# Altium PCB PIPOCPUF_2006.PCBDOC (part 2 of 6)
Units mil, origin at the board's own origin, x right, y up, seen from the top; angles counter-clockwise.
Board outline 8500 x 4525 mil, 2 copper layers (Top Layer, Top, Bottom Layer, Bottom); 345 components, 259 nets, 1116 pads, 603 vias.
Unrouted connection lines stored in the file: 781.
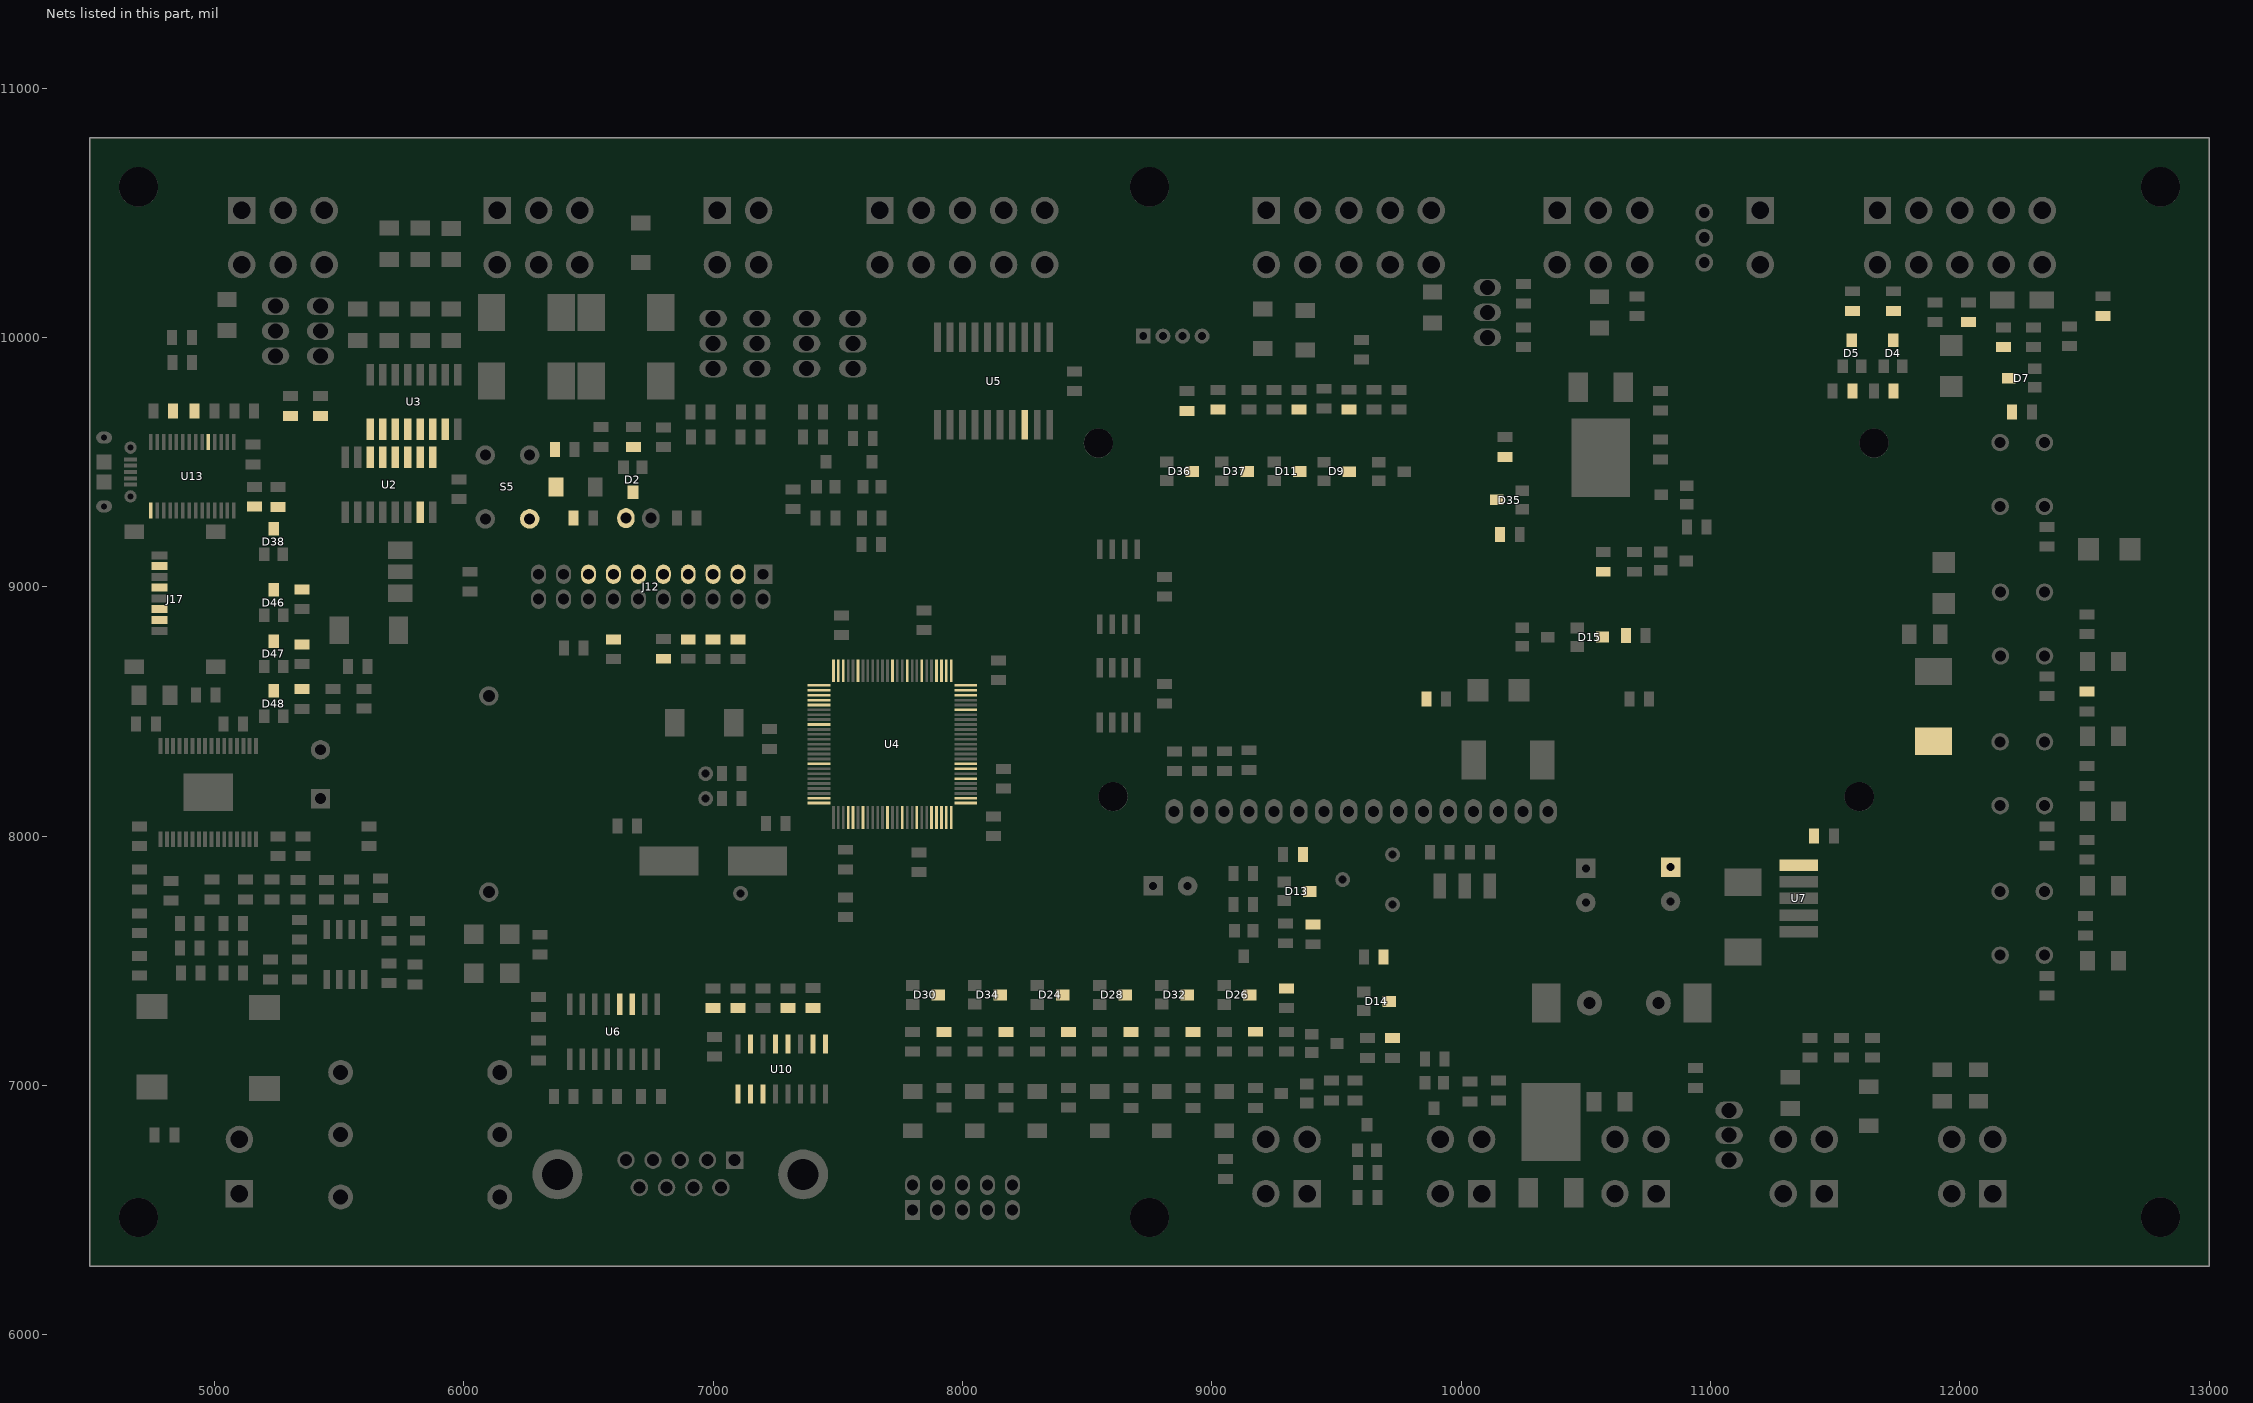
[diagram p2: the nets of this part, all layers, seen from the top]

## Via types
v1: diameter 28, hole 16, Top Layer, Top to Bottom Layer, Bottom, 595 vias
v2: diameter 36, hole 24, Top Layer, Top to Bottom Layer, Bottom, 4 vias
v3: diameter 40, hole 24, Top Layer, Top to Bottom Layer, Bottom, 4 vias

## Nets (pads, with @x,y where several pads share a name; then routed paths per layer and width w, separated by ;. In a path a pad name is that pad's centre, name@x,y a point inside that pad or via, vN(x,y) a via of type N, cw(c..) or ccw(c..) an arc to the next point about the centre after c; other vN are vias at no path point) (continued)
NETR128_1: R128.1 R129.2 U13.19
NETU2_1: U2.1 U3.6
NETU2_2: U2.2 U3.5
NETU2_3: U2.3 U3.4
NETU2_4: U2.4 U3.3
NETU2_5: U2.5 U3.2
NETU2_6: U2.6 U3.1
NETU2_15: U2.15 U3.7
P_FITA_LED_DIR: R38.1 U4.85
P_FITA_LED_ESQ: R36.1 U4.82
PULSO_CONT_MOTOR: R13.1 U4.70
PULSO_CONT_RES: R12.2 U4.73
PULSO_MOEDE_UCA1: C32.2 D13.3 R42.1 U4.51
PULSO_NOTEI_P70: C33.2 D14.3 R43.2 U4.50
REED_DOSADOR: D2.3 R8.2 U4.88
RESET: C34.2 D3.1 J12.15 R48.1 S5.2 U4.17
RM5_CH1: D24.3 R74.2 U4.59
RM5_CH2: D28.3 R79.2 U4.58
RM5_CH3: D32.3 R91.2 U4.25
RM5_CH4: D26.3 R75.2 U4.24
RM5_CH5: D30.3 R84.2 U4.29
RM5_CH6: D34.3 R92.2 U4.30
RM5_INHIBIT: R70.2 U4.40
RS232_RXD: U6.12 U10.1
RS232_TXD: R62.2 U6.11 U10.12
RTCK: J12.11 J14.2 U4.100
RXD_MDB: C49.2 D35.3 R101.2 U4.49
RXD_MOEDEIRO: D15.3 R59.2 U4.99
RXD_PROG: R64.1 U4.47 U10.3
SAIDA_01: U4.95 U5.8
SAIDA_PAPEL: D11.3 R23.2 U4.37
SD_CS: D48.3 J17.2 R4.2 U4.79
SD_MISO: D38.3 J17.7 U4.77
SD_MOSI: D47.3 J17.3 R5.2 U4.76
SD_SCLK: D46.3 J17.5 R6.2 U4.78
SEL_PROG_DEX_A: U4.43 U10.10
SEL_PROG_DEX_B: U4.56 U10.9
SINAL_RPM: C10.1 D5.3 R15.2 U4.32
SINCRONISMO_60HZ: C9.1 D4.3 R11.2 U4.52
SW_MINIMO_PAPEL: D9.3 R21.2
TCK: J12.9 R51.1 U4.5
TDI: J12.5 R46.2 U4.2
TDO: J12.13 R44.2 U4.1
TELET_RXD: D37.3 R102.2 U4.74
TELET_TXD: D36.3 R97.2 U4.75
TEMPERATURA: C11.2 D7.3 R17.2 U4.9
TMS: J12.7 R45.2 U4.3
TRSTN: J12.3 R47.2 U4.4
TXD_MDB: R98.2 U4.48
TXD_MOEDEIRO: R60.2 U4.98
TXD_PROG: R63.1 U4.46 U10.13
USB_RXD: R126.1 R127.2 U10.2
USB_TXD: R122.2 U10.15 U13.1
VIN: C38.1 C39.2 D16.2 R123.2 U7.1
pads on no net: J3.8 J4.5 J4.9 J6.5 J6.6 J7.9 J7.10 J10.1 J10.4 J10.6 J10.7 J10.8 J10.9 J10._1 J10.A2 J11.3 J13.5 J15.3 J17.1 J17.8 J21.4 J21.g5 J21.g6 LCD1.7 LCD1.8 LCD1.9 LCD1.10 LCD1._1 LCD1._2 LCD1._3 LCD1.A4 S1.3 S1.4 S2.3 S2.4 S3.3 S3.4 S4.3 S4.4 S5.3 S5.4 U2.7 U2.9 U3.9 U4.13 U4.14 U5.11 U10.4 U10.11 U12.4 U12.6 U12.10 U12.13 U13.2 U13.3 U13.6 U13.8 U13.9 U13.10 U13.11 U13.12 U13.13 U13.14 U13.22 U13.23 U13.24 U13.26 U13.27 U13.28
copper on no net: | length 1524356.9
  Top Layer, Top w10: v3@4537,9332 v3@4577,9332 ; v3@4537,9336 v3@4577,9336 ; v3@4537,9340 v3@4577,9340 ; 4537,9345 4577,9345 ; 4537,9349 4577,9349 ; 4537,9354 4577,9354 ; 4537,9358 4577,9358 ; 4537,9560 4576,9560 ; 4537,9564 4576,9564 ; 4537,9568 4576,9568 ; 4537,9573 4576,9573 ; 4537,9577 4576,9577 ; v3@4537,9582 v3@4576,9582 ; v3@4537,9586 v3@4576,9586 ; 4745,9305 4745,9300 4650,9300 4615,9265 4615,8650 4635,8630 4830,8630 4835,8635 v1(4855,8635) ; 4780,8910 4785,8915 4870,8915 4940,8985 v1(4940,9110) ; 4785,9075 v1(4835,9075) ; 4790,8915 v1(4840,8915) ; 4795,9000 v1(4835,9000) ; 4800,8865 v1(4850,8865) ; 4847,9305 4847,9263 v1(4860,9245) ; v1(5110,9250) 5110,9385 5130,9405 5155,9405 5160,9400 ; 5160,9321 5175,9320 5255,9320 5305,9320 5330,9295 5330,9105 5395,9040 v1(5395,8460) ; 5235,9000 v1(5235,9035) ; v1(5235,9075) 5235,9235 ; 5240,8590 v1(5240,8630) ; 5240,8780 v1(5240,8830) ; v1(5250,9680) 5305,9680 5305,9685 ; 5345,8600 v1(5345,8630) ; 5350,8785 v1(5350,8830) ; 5350,8995 v1(5350,9035) ; 5425,9685 5435,9685 v1(5480,9685) ; 5465,8990 5525,8990 ; 5465,8995 5525,8995 ; 5465,9000 5525,9000 ; 5465,9005 5525,9005 ; 5465,9010 5525,9010 ; 5465,9015 5525,9015 ; 5465,9020 5525,9020 ; 5465,9025 5525,9025 ; 5465,9030 5525,9030 ; 5465,9035 5525,9035 ; 5465,9040 5525,9040 ; 5465,9045 5525,9045 ; 5465,9050 5525,9050 ; 5465,9055 5525,9055 ; 5465,9060 5525,9060 ; 5465,9065 5525,9065 ; 5465,9070 5525,9070 ; 5465,9075 5525,9075 ; 5465,9080 5525,9080 ; 5465,9085 5525,9085 ; 5465,9090 5525,9090 ; 5465,9095 5525,9095 ; 5465,9100 5525,9100 ; 5465,9105 5525,9105 ; 5465,9110 5525,9110 ; 5465,9115 5525,9115 ; 5465,9120 5525,9120 ; 5465,9125 5525,9125 ; 5625,9299 5625,9235 5660,9200 5800,9200 5895,9105 5895,8560 5970,8485 v1(5970,7765) ; v1(5625,9710) 5625,9851 ; v1(5650,8375) 5650,8175 5710,8115 5710,7900 5780,7830 5780,7750 v1(5795,7735) ; 5665,7830 5645,7830 5725,7830 5750,7805 5750,7590 5740,7580 5700,7580 ; 5675,9299 5675,9285 5675,9235 5690,9220 5815,9220 5915,9120 5915,8570 5920,8565 5990,8500 v1(6000,7720) ; v1(5675,9750) 5675,9851 ; 5775,9299 5775,9280 5775,9250 5785,9240 5825,9240 5945,9120 5945,8585 6045,8485 6045,8475 v1(6045,7925) ; 5815,7660 5815,7655 5815,7690 5895,7770 v1(5895,8495) ; 6040,7606 6065,7610 6305,7610 6335,7640 v1(6335,8460) ; v1(6075,7335) 6075,7330 6040,7295 6040,6895 6140,6795 6144,6802 ; v1(6175,9700) 6175,8815 6185,8805 6180,8810 6210,8780 6370,8620 v1(6370,7530) ; v1(6220,9725) 6220,9665 6195,9640 6195,8835 6395,8635 6395,7570 6405,7560 v1(6410,7560) ; v1(6435,8340) 6435,8360 6425,8370 6425,8645 6220,8850 6220,9165 6270,9215 6270,9285 6270,9270 6435,9270 6435,9175 6500,9110 6500,9050 ; v1(6485,7585) v1(6485,7910) ; v1(6500,8670) 6500,7970 6535,7935 6535,7840 6640,7735 6920,7735 6945,7710 6945,7335 6945,7310 6970,7310 7000,7310 ; 6580,8110 6910,8110 ; 6580,8115 6910,8115 ; 6580,8120 6910,8120 ; 6580,8125 6910,8125 ; 6580,8130 6910,8130 ; 6580,8135 6910,8135 ; 6580,8140 6910,8140 ; 6580,8145 6910,8145 ; 6580,8150 6910,8150 ; 6580,8155 6910,8155 ; 6580,8160 6910,8160 ; 6580,8165 6910,8165 ; 6580,8170 6910,8170 ; 6580,8175 6910,8175 ; 6580,8180 6910,8180 ; 6580,8185 6910,8185 ; 6580,8190 6910,8190 ; 6580,8195 6910,8195 ; 6580,8200 6910,8200 ; 6580,8205 6910,8205 ; 6580,8210 6910,8210 ; 6580,8215 6910,8215 ; 6580,8220 6910,8220 ; 6580,8225 6910,8225 ; 6580,8230 6910,8230 ; 6580,8235 6910,8235 ; 6580,8240 6910,8240 ; 6580,8245 6910,8245 ; 6580,8250 6910,8250 ; 6580,8255 6910,8255 ; 6580,8260 6910,8260 ; 6580,8265 6910,8265 ; 6580,8270 6910,8270 ; 6580,8275 6910,8275 ; 6580,8280 6910,8280 ; 6580,8285 6910,8285 ; v1(6595,8825) 6595,8785 6600,8789 ; v1(6625,7245) 6625,7290 6625,7325 ; v1(6675,7255) 6675,7315 ; v1(6725,7025) 6725,7105 ; 6725,7325 6725,7260 v1(6735,7250) ; v1(6725,9375) 6685,9375 6680,9380 6678,9378 ; v1(6775,7020) 6775,7105 ; 6775,7325 v1(6775,7395) ; 6800,8711 6810,8705 6830,8705 6850,8685 v1(6850,8630) ; 6823,7900 6745,7930 6705,7970 6705,8025 7100,8025 7180,8105 7255,8105 7341,8191 7400,8191 ; v1(6825,7500) 6825,7250 6885,7190 6885,7095 6930,7050 v1(6930,6900) ; 6905,8790 6900,8790 6890,8785 6930,8785 6950,8765 v1(6950,8620) ; 6910,8105 6920,8095 7075,8095 7110,8130 ; v1(6940,7145) 6940,7155 6945,7160 6945,7340 ; 6970,8150 6980,8150 7035,8150 7030,8160 7070,8200 7075,8205 7075,8285 7085,8295 7155,8295 7180,8270 7400,8270 ; 6970,8250 6990,8250 7030,8250 7030,8270 ; 7005,8790 7030,8790 7045,8775 v1(7045,8635) ; 7035,8270 7035,8305 7045,8315 7165,8315 7171,8309 7170,8310 7265,8310 7290,8335 7325,8335 7351,8309 7400,8309 ; 7095,7310 7095,7300 7095,7280 7070,7255 7070,7245 7070,7115 7145,7040 7195,7040 v1(7200,7035) 7200,6970 7200,6965 ; 7095,7320 7100,7315 ; 7095,8795 7135,8795 7155,8775 v1(7155,8680) ; 7100,6965 v1(7100,7035) ; 7114,8150 7115,8150 7114,8169 7114,8250 ; v1(7150,6900) 7150,6965 ; 7150,7165 7150,7100 v1(7160,7090) ; v1(7165,8020) 7184,8039 7220,8039 ; 7178,7900 7240,7925 7290,7975 7290,8050 ; 7189,9600 7185,9595 7185,9285 7260,9210 7260,8910 7210,8860 v1(7210,8660) v1@7210,8665 ; 7200,7170 7200,7315 ; v1(7220,9385) 7220,9380 7240,9360 7240,9265 7285,9220 7285,8900 7240,8855 7240,8515 7285,8470 7308,8447 7343,8447 7425,8447 ; 7235,8355 7345,8355 ; 7235,8360 7345,8360 ; 7240,8430 7282,8388 7425,8388 ; 7245,8345 7245,8355 7345,8355 ; v1(7250,7095) 7250,7165 7250,7220 7305,7275 7305,7310 7300,7311 ; v1(7260,8160) 7275,8160 7326,8211 7425,8211 ; v1(7265,8200) 7275,8200 7305,8230 7360,8230 7425,8230 ; v1(7265,8240) 7275,8250 7425,8250 ; v1(7265,9415) 7265,9275 7305,9235 7305,8890 7265,8850 7265,8525 7305,8485 7323,8467 7425,8467 ; v1(7300,6900) 7300,6930 7300,6960 7300,6965 ; 7300,7165 7300,7215 7310,7225 7400,7225 v1@7410,7235 ; v1(7310,8300) 7315,8290 7425,8290 ; 7320,9311 7320,9320 7320,9270 7375,9215 7375,8695 7410,8660 v1(7410,8645) ; v1(7335,8535) 7344,8526 7425,8526 ; v1(7335,8580) 7350,8565 7425,8565 ; v1(7340,8630) 7340,8615 7370,8585 7425,8585 ; v1(7345,8495) 7356,8506 7425,8506 ; 7357,8388 7360,8390 7360,8425 7362,8427 7308,8427 7238,8427 7425,8427 ; v1(7360,9470) 7360,9585 7361,9600 ; v1(7400,7100) 7400,7160 7400,7165 ; 7400,7311 7405,7290 v1(7405,7230) ; 7400,8171 7356,8171 7290,8105 7290,8050 ; 7425,7475 7450,7450 ; 7425,8132 7402,8132 7402,7608 7402,7533 7405,7530 7480,7455 7480,7445 v1(7480,7405) ; 7425,8152 7367,8152 7360,8145 7360,8110 7370,8100 7370,7530 7450,7450 ; 7425,8329 7366,8329 7350,8350 7345,8355 ; 7425,8408 7487,8408 7495,8400 7495,8335 7489,8329 7391,8329 7371,8329 7345,8355 ; 7425,8486 7489,8486 v1(7505,8470) ; 7425,8545 7490,8545 v1(7505,8530) ; 7425,8605 7455,8605 7450,8605 7450,8695 7425,8720 v1(7425,8780) ; 7450,7165 7450,7285 7460,7295 v1(7460,7315) ; 7450,7415 7450,7450 ; v1(7450,7865) 7450,7775 7435,7760 7435,7535 7510,7460 7510,7450 v1(7510,7035) ; v1(7460,7365) 7450,7375 7450,7450 ; v1(7460,7950) 7450,7960 7450,8050 7474,8074 7483,8074 ; v1(7460,9095) 7460,8720 7483,8697 7483,8687 7483,8663 ; v1(7465,7725) 7465,7745 7480,7760 ; v1(7485,7985) 7502,8002 7502,8074 ; v1(7500,8590) 7522,8612 7522,8663 ; 7502,8663 7502,8727 v1(7505,8730) ; 7505,7945 7480,7920 7480,7760 ; 7522,8192 7550,8220 7570,8200 ; 7525,8195 7510,8180 7510,8140 7522,8128 7522,8074 7522,7963 7530,7945 ; v1(7530,8565) 7542,8577 7542,8663 7542,8768 7542,8793 7530,8805 ; 7535,7755 7485,7755 7480,7760 ; 7535,8875 7561,8849 7561,8794 7561,8663 7561,8524 ; 7542,8074 7542,8008 v1(7550,8000) ; 7550,7860 7535,7860 7515,7860 7525,7870 7560,7870 7581,7891 7581,8074 7581,8161 v1@7590,8170 ; v1(7550,8145) 7561,8134 7561,8129 7561,8074 ; v1(7575,7585) 7575,7620 7640,7685 7640,8074 ; v1(7575,7825) 7601,7851 7601,8074 ; 7581,8931 7581,8663 v1(7581,9084) ; v1(7585,7770) 7620,7805 7620,8074 ; v1(7590,7070) 7615,7095 v1(7615,7585) ; v1(7590,8590) 7601,8601 7601,8663 ; v1@7615,9050 7615,8745 7640,8720 7640,8663 ; 7620,8663 7620,8600 7645,8575 v1(7640,8570) ; 7640,8290 7795,8290 ; 7640,8295 7795,8295 ; 7640,8300 7795,8300 ; 7640,8305 7795,8305 ; 7640,8310 7795,8310 ; 7640,8315 7795,8315 ; 7640,8320 7795,8320 ; 7640,8325 7795,8325 ; 7640,8330 7795,8330 ; 7640,8335 7795,8335 ; 7640,8340 7795,8340 ; 7640,8345 7795,8345 ; 7640,8350 7795,8350 ; 7640,8355 7795,8355 ; 7640,8360 7795,8360 ; 7640,8365 7795,8365 ; 7640,8370 7795,8370 ; 7640,8375 7795,8375 ; 7640,8380 7795,8380 ; 7640,8385 7795,8385 ; 7640,8390 7795,8390 ; 7640,8395 7795,8395 ; 7640,8400 7795,8400 ; 7640,8405 7795,8405 ; 7640,8410 7795,8410 ; 7640,8415 7795,8415 ; 7640,8420 7795,8420 ; 7640,8425 7795,8425 ; 7640,8430 7795,8430 ; 7640,8435 7795,8435 ; 7640,8440 7795,8440 ; v1(7660,7605) 7660,8074 ; 7660,8663 7660,8745 ; v1(7665,9025) 7665,9050 7675,9060 7674,9170 ; 7679,8074 7679,7641 v1(7690,7630) ; 7679,8663 7679,8729 v1(7690,8740) v1@7689,8741 ; 7699,8074 7699,7721 7730,7690 7730,7620 v1(7735,7615) ; v1(7699,8589) 7699,8663 ; v1(7710,6905) 7710,7370 7710,7455 7770,7515 7770,7805 7738,7837 7738,8074 ; 7719,8074 7719,7804 v1(7735,7790) ; 7719,8663 7719,8861 7705,8875 7705,9015 7720,9030 v1@7719,9271 ; v1@7719,9269 v1(7720,9270) ; 7738,8663 7738,8858 7738,8877 7730,8885 7730,8945 7730,8965 v1(7740,8975) ; v1@7745,7345 v1(7745,7350) 7745,7355 7745,7450 7790,7500 7790,7815 7775,7830 7775,7850 7758,7867 7758,8074 ; 7758,8663 7758,8888 7758,8893 v1(7760,8935) ; v1(7770,8165) 7778,8157 7778,8074 7778,7887 7800,7865 ; 7778,8663 7778,8787 7778,8898 7790,8910 v1(7790,9650) ; 7798,8202 7798,8074 7798,7962 7810,7950 ; 7798,8523 7798,8663 7798,8848 7798,8873 7825,8900 7850,8900 ; 7817,8074 7817,7978 7825,7970 7860,7970 7900,7930 7900,7755 7915,7740 7915,7645 7910,7640 7895,7625 7895,7485 7855,7445 7855,7180 v1(7855,7175) ; v1(7830,8160) 7837,8153 7837,8074 ; v1@7830,8565 7817,8583 7817,8663 7817,8777 7817,8787 7840,8810 7845,8815 ; 7837,8663 7837,8742 7837,8767 7855,8785 7865,8785 ; v1(7855,9685) 7865,9675 7865,9555 7890,9530 7890,9410 7890,9005 7890,8795 7880,8785 7860,8785 ; 7857,8074 7857,8132 7865,8140 7920,8140 v1(7935,8155) ; 7857,8663 7857,8583 v1(7870,8570) ; 7866,8526 7880,8520 7925,8520 7931,8526 8013,8526 8131,8526 8190,8585 8190,8675 8165,8700 ; v1(7870,8755) 7876,8741 7876,8663 ; 7876,8074 7876,7984 7920,7940 7920,7790 7940,7770 7940,7620 7930,7610 v1(7930,7580) ; 7880,8205 7894,8191 8013,8191 8146,8191 ; 7896,8074 7896,7994 7945,7945 7945,7865 v1(7955,7860) ; 7896,8663 7896,8726 7896,8741 7910,8755 7910,8775 v1(7920,8785) ; 7902,7362 7905,7350 7905,7405 7980,7480 8060,7560 v1(8060,8000) ; v1(7910,8550) 7915,8545 8013,8545 ; 7916,8074 7916,8004 7955,7965 7975,7945 v1(7975,7900) ; 7916,8663 7916,8731 7950,8765 ; v1(7920,8225) 7934,8211 ; v1(7925,8395) 7910,8380 7910,8330 7931,8309 8013,8309 ; 7935,8074 7935,8015 7985,7965 7990,7960 8005,7945 8005,7715 7995,7705 7975,7685 v1(7975,7585) ; v1(7935,8270) 7955,8250 8013,8250 ; 7935,8663 7935,8720 7985,8770 7985,8835 v1(7970,8850) ; v1(7940,8355) 7940,8350 7961,8329 8013,8329 ; v1(7940,8490) 7946,8506 8013,8506 ; v1(7950,8810) v1@7950,8805 ; v1(7950,9435) 7950,9650 ; 7955,8074 7955,8030 8025,7960 v1(8025,7640) ; 7955,8663 7955,8675 8015,8735 8015,8780 v1(8015,8875) ; 8000,9650 8000,9425 8215,9210 8215,8835 8215,8575 8126,8486 8013,8486 ; 8013,8132 8038,8132 8038,8067 v1(8050,8055) ; 8013,8152 8078,8152 v1(8090,8140) ; 8013,8171 8069,8171 8114,8171 8125,8160 8125,8085 8120,8080 ; 8013,8230 8080,8230 v1(8100,8250) ; 8013,8270 8075,8270 8115,8310 8205,8310 8230,8285 8230,8255 8255,8230 8255,8180 8310,8125 8310,8090 8300,8080 8300,7610 v1(8305,7600) ; 8013,8290 8065,8290 8105,8330 8220,8330 8250,8300 8250,8270 8275,8245 8275,8195 8335,8135 8335,7490 8405,7420 8405,7280 8430,7255 8430,7225 8425,7214 ; 8013,8349 8141,8349 8234,8349 8360,8475 8360,8480 8360,8495 8360,8870 8380,8890 8380,8950 v1(8380,9250) ; 8013,8368 8203,8368 8335,8500 8335,8860 8335,8895 v1(8350,8910) ; 8013,8388 8193,8388 8315,8510 8315,8930 8315,9305 8200,9415 8200,9650 ; 8013,8408 8183,8408 8295,8520 8295,8920 8295,9290 8150,9435 8150,9650 ; 8013,8427 8167,8427 8275,8535 8275,8905 8275,9275 8100,9450 8100,9650 ; 8013,8447 8152,8447 8255,8550 8255,8890 8255,9265 8050,9470 8050,9650 ; 8013,8467 8137,8467 8230,8560 8235,8565 8235,8855 8235,9245 8055,9425 v1@8045,9435 ; 8013,8585 8065,8585 ; 8050,8585 8065,8585 ; v1(8050,9305) 8070,9285 8070,8620 ; 8070,8810 8070,8620 ; 8090,8800 8090,8610 ; v1(8100,9275) 8090,9265 8090,8610 ; 8125,8079 8130,8085 ; 8140,8260 8150,8260 8150,8250 8111,8211 8091,8211 8013,8211 ; 8140,8625 8140,8570 8115,8545 8015,8545 ; 8175,7214 8175,7270 8150,7295 8150,7360 8185,7360 8205,7380 8205,7415 8275,7485 8275,8105 v1(8280,8110) ; 8250,9650 8250,9400 8344,9306 v1(8344,9084) ; v1(8310,8225) 8310,8380 8385,8455 8385,8855 8410,8880 8410,9015 v1(8420,9025) ; v1(8330,8190) 8330,8195 8340,8205 8340,8375 8410,8445 8410,8845 8440,8875 8440,9000 8450,9010 8450,9395 v1(8400,9445) ; v1(8370,8250) 8370,8235 8365,8230 8365,7515 8450,7430 v1(8450,7315) ; v1(8405,7890) v1(8405,8325) ; v1(8445,7770) 8455,7780 8455,7905 8435,7925 8435,8300 8455,8320 8455,8370 8490,8405 8490,9265 8715,9490 v1(8715,9765) ; v1(8470,8030) 8510,7990 8695,7990 8745,8040 v1(8745,8045) ; v1(8500,8365) 8500,8375 8520,8395 8520,8585 8550,8615 8550,8650 8550,8675 8550,8740 8600,8790 8600,8830 8600,8850 ; 8550,8850 v1(8550,8910) ; v1(8600,8395) 8600,8455 ; v1(8645,9250) 8645,9175 8650,9150 ; v1(8650,7600) 8652,7362 ; 8700,8455 8700,8345 8725,8320 v1(8725,8275) ; 8700,9150 8700,9155 8700,9090 8735,9055 v1(8735,8375) ; v1(8775,8840) 8760,8825 8760,8480 8785,8455 v1(8785,7920) ; 8850,8339 8855,8330 v1(8855,8450) ; 8902,7363 8890,7365 8890,7375 8925,7410 8955,7410 v1(8965,7405) ; v1@8917,9298 v1(8920,9295) ; v1@8922,9308 8922,9463 ; 8950,8339 8955,8350 v1(8955,8805) ; v1(9030,7850) 9086,7850 ; 9050,8340 v1(9050,8580) ; 9055,6704 v1(9055,6755) ; v1(9140,9275) 9140,9470 9142,9462 ; 9150,8344 v1(9150,8560) ; 9152,7362 9175,7355 9185,7355 9195,7365 v1(9195,7400) ; 9273,6968 9275,6965 9275,6910 9300,6885 v1(9300,6700) ; 9300,7389 9300,7390 v1(9355,7390) ; 9350,9710 9350,9585 9355,9580 ; 9352,9463 9365,9470 v1(9365,8255) ; v1(9365,7985) 9365,7920 9365,7850 9390,7825 9392,7778 ; v1(9500,6840) 9500,6535 9540,6495 9650,6495 9665,6510 9665,6540 9664,6550 ; v1(9545,7385) 9545,7390 9560,7405 9560,7740 9595,7775 v1(9595,7980) ; v1(9645,8840) 9649,8099 ; v1(9665,7385) 9665,7295 9675,7285 v1(9675,7245) ; 9685,7520 9685,7460 9705,7440 9705,7340 ; v1(9685,7635) 9685,7525 9689,7515 ; 9710,7335 9712,7337 ; 9775,9460 v1(9820,9460) ; 9814,7200 10217,7200 ; 9814,7205 10217,7205 ; 9814,7210 10217,7210 ; 9814,7215 10217,7215 ; 9814,7220 10217,7220 ; 9814,7225 10217,7225 ; 9814,7230 10217,7230 ; 9814,7235 10217,7235 ; 9814,7240 10217,7240 ; 9814,7245 10217,7245 ; 9814,7250 10217,7250 ; 9814,7255 10217,7255 ; 9814,7260 10217,7260 ; 9814,7265 10217,7265 ; 9814,7270 10217,7270 ; 9814,7275 10217,7275 ; 9814,7280 10217,7280 ; 9814,7285 10217,7285 ; 9814,7290 10217,7290 ; 9814,7295 10217,7295 ; 9814,7300 10217,7300 ; 9814,7305 10217,7305 ; 9814,7310 10217,7310 ; 9814,7315 10217,7315 ; 9814,7320 10217,7320 ; 9814,7325 10217,7325 ; 9814,7330 10217,7330 ; 9814,7335 10217,7335 ; 9814,7340 10217,7340 ; 9814,7345 10217,7345 ; 9814,7350 10217,7350 ; 9814,7355 10217,7355 ; 9814,7360 10217,7360 ; 9814,7365 10217,7365 ; 9814,7370 10217,7370 ; 9814,7375 10217,7375 ; 9814,7380 10217,7380 ; 9814,7385 10217,7385 ; 9814,7390 10217,7390 ; 9814,7395 10217,7395 ; 9814,7400 10217,7400 ; 9814,7405 10217,7405 ; 9814,7410 10217,7410 ; 9814,7415 10217,7415 ; 9814,7420 10217,7420 ; 9814,7425 10217,7425 ; 9814,7430 10217,7430 ; 9814,7435 10217,7435 ; 9814,7440 10217,7440 ; 9814,7445 10217,7445 ; 9814,7450 10217,7450 ; 9814,7455 10217,7455 ; 9814,7460 10217,7460 ; 9814,7465 10217,7465 ; 9814,7470 10217,7470 ; 9814,7475 10217,7475 ; 9814,7480 10217,7480 ; 9814,7485 10217,7485 ; 9814,7490 10217,7490 ; 9814,7495 10217,7495 ; 9814,7500 10217,7500 ; 9814,7505 10217,7505 ; 9814,7510 10217,7510 ; 9814,7515 10217,7515 ; 9814,7520 10217,7520 ; 9814,7525 10217,7525 ; 9814,7530 10217,7530 ; 9814,7535 10217,7535 ; 9814,7540 10217,7540 ; 9814,7545 10217,7545 ; 9814,7550 10217,7550 ; 9814,7555 10217,7555 ; 9814,7560 10217,7560 ; 9814,7565 10217,7565 ; 9814,7570 10217,7570 ; 9814,7575 10217,7575 ; 9814,7580 10217,7580 ; 9814,7585 10217,7585 ; 9814,7590 10217,7590 ; 9814,7595 10217,7595 ; 9814,7600 10217,7600 ; 9814,7605 10217,7605 ; 9814,7610 10217,7610 ; 9814,7615 10217,7615 ; 9814,7620 10217,7620 ; 9814,7625 10217,7625 ; 9814,7630 10217,7630 ; 9814,7635 10217,7635 ; 9814,7640 10217,7640 ; 9814,7645 10217,7645 ; 9814,7650 10217,7650 ; 9814,7655 10217,7655 ; 9814,7660 10217,7660 ; 9814,7665 10217,7665 ; v1(9860,8650) 9860,8560 9861,8550 ; 9935,7115 v1@9935,7165 ; v1(9940,8420) 9940,8535 9940,8550 ; v1(10140,8445) 10140,8660 10115,8685 10115,9115 10155,9155 10155,9200 10156,9210 ; 10150,6940 10540,6935 10540,7035 10655,7150 10655,7425 10675,7445 10675,8045 10715,8085 10715,8615 10740,8640 10740,8805 ; 10345,8800 10345,8735 10405,8675 v1(10405,7970) ; v1(10455,8025) v1(10455,8405) ; 10567,8798 10658,8798 10661,8805 v1(10660,8655) ; v1(10570,8850) 10570,9060 ; v1(10605,7575) 10605,7640 10620,7655 v1(10625,8445) ; v1(10645,7605) 10645,7625 10650,7630 10650,8240 v1(10665,8255) ; 10675,8550 10680,8545 v1(10680,8360) ; v1(10715,7185) 10715,7385 10750,7420 v1(10750,7985) ; 10754,8550 10754,8074 10705,8025 10705,7430 10680,7405 10680,7155 10710,7125 10860,7125 10920,7065 10980,7065 11070,6975 11070,6905 ; v1(11170,8205) 11170,9715 11245,9790 11245,10040 v1(11235,10050) ; v1(11215,8020) v1(11215,9700) ; v1(11260,8540) 11275,8555 11275,10050 v1(11310,10085) ; v1(11305,8465) v1(11305,10015) ; 11490,9785 11495,9790 11495,9815 11530,9850 11530,9885 ; 11525,7190 11525,7200 v1(11525,7230) ; v1(11565,9720) 11565,9805 11569,9785 11567,9807 11567,9988 11570,9980 11570,10106 ; 11656,9785 11655,9775 11655,9805 11695,9845 11695,9885 ; 11660,7585 11940,7585 ; 11660,7590 11940,7590 ; 11660,7595 11940,7595 ; 11660,7600 11940,7600 ; 11660,7605 11940,7605 ; 11660,7610 11940,7610 ; 11660,7615 11940,7615 ; 11660,7620 11940,7620 ; 11660,7625 11940,7625 ; 11660,7630 11940,7630 ; 11660,7635 11940,7635 ; 11660,7640 11940,7640 ; 11660,7645 11940,7645 ; 11660,7650 11940,7650 ; 11660,7655 11940,7655 ; 11660,7660 11940,7660 ; 11660,7665 11940,7665 ; 11660,7670 11940,7670 ; 11660,7675 11940,7675 ; 11660,7680 11940,7680 ; 11660,7685 11940,7685 ; 11660,7690 11940,7690 ; 11660,7695 11940,7695 ; 11660,7700 11940,7700 ; 11660,7705 11940,7705 ; 11660,7710 11940,7710 ; 11660,7715 11940,7715 ; 11660,7720 11940,7720 ; 11660,7725 11940,7725 ; 11660,7730 11940,7730 ; 11660,7735 11940,7735 ; 11660,7740 11940,7740 ; 11660,7745 11940,7745 ; 11660,7750 11940,7750 ; 11660,7755 11940,7755 ; 11660,7760 11940,7760 ; 11660,7765 11940,7765 ; 11660,7770 11940,7770 ; 11660,7775 11940,7775 ; 11660,7780 11940,7780 ; 11660,7785 11940,7785 ; 11660,7790 11940,7790 ; 11660,7795 11940,7795 ; 11660,7800 11940,7800 ; 11660,7805 11940,7805 ; 11660,7810 11940,7810 ; 11660,7815 11940,7815 ; 11660,7820 11940,7820 ; 11660,7825 11940,7825 ; 11660,7830 11940,7830 ; 11660,7835 11940,7835 ; 11660,7840 11940,7840 ; 11660,7845 11940,7845 ; 11660,7850 11940,7850 ; 11660,7855 11940,7855 ; 11660,7860 11940,7860 ; 11660,7865 11940,7865 ; 11660,7870 11940,7870 ; 11660,7875 11940,7875 ; 11660,7880 11940,7880 ; 11660,7885 11940,7885 ; 11660,7890 11940,7890 ; 11660,7895 11940,7895 ; 11660,7900 11940,7900 ; 11660,7905 11940,7905 ; 11660,7910 11940,7910 ; 11735,9785 11733,9793 11733,9988 11735,10020 11735,10106 v1(11735,10050) ; v1(11840,7485) 11840,7090 11867,7063 11930,7063 ; v1(11840,9765) 11840,10040 11860,10060 11890,10060 11900,10061 ; 11960,7550 12030,7550 11962,7550 ; 11960,7555 12030,7555 ; 11960,7560 12030,7560 ; 11960,7565 12030,7565 ; 11960,7570 12030,7570 ; 11960,7575 12030,7575 ; 11960,7580 12030,7580 ; 11960,7585 12030,7585 ; 11960,7590 12030,7590 ; 11960,7595 12030,7595 ; 11960,7600 12030,7600 ; 11960,7605 12030,7605 ; 11960,7610 12030,7610 ; 11960,7615 12030,7615 ; 11960,7620 12030,7620 ; 11960,7625 12030,7625 ; 11960,7630 12030,7630 ; 11960,7635 12030,7635 ; 11960,7640 12030,7640 ; 11960,7645 12030,7645 ; 11960,7650 12030,7650 ; 11960,7655 12030,7655 ; 11960,7660 12030,7660 ; 11960,7665 12030,7665 ; 11960,7670 12030,7670 ; 11960,7675 12030,7675 ; 11960,7680 12030,7680 ; 11960,7685 12030,7685 ; 11960,7690 12030,7690 ; 11960,7695 12030,7695 ; 11960,7700 12030,7700 ; 11960,7705 12030,7705 ; 11960,7710 12030,7710 ; 11960,7715 12030,7715 ; 11960,7720 12030,7720 ; 11960,7725 12030,7725 ; 11960,7730 12030,7730 ; 11960,7735 12030,7735 ; 11960,7740 12030,7740 ; 11960,7745 12030,7745 ; 11960,7750 12030,7750 ; 11960,7755 12030,7755 ; 11960,7760 12030,7760 ; 11960,7765 12030,7765 ; 11960,7770 12030,7770 ; 11960,7775 12030,7775 ; 11960,7780 12030,7780 ; 11960,7785 12030,7785 ; 11960,7790 12030,7790 ; 11960,7795 12030,7795 ; 11960,7800 12030,7800 ; 11960,7805 12030,7805 ; 11960,7810 12030,7810 ; 11960,7815 12030,7815 ; 11960,7820 12030,7820 ; 11960,7825 12030,7825 ; 11960,7830 12030,7830 12022,7830 ; 11960,7835 12030,7835 12023,7835 ; 11960,7840 12030,7840 12024,7840 ; 11960,7845 12030,7845 12025,7845 ; 11960,7850 12030,7850 12026,7850 ; 11960,7855 12030,7855 12027,7855 ; 11960,7860 12030,7860 12028,7860 ; 11960,7865 12030,7865 12029,7865 ; 11960,7870 12030,7870 ; 11960,7875 12030,7875 ; 11960,7880 12030,7880 ; 11960,7885 12030,7885 ; 11960,7890 12030,7890 ; 11960,7895 12030,7895 ; 11960,7900 12030,7900 ; 11960,7905 12030,7905 ; 11960,7910 12030,7910 ; 11960,7915 12030,7915 ; 11960,7920 12030,7920 ; 11960,7925 12030,7925 ; 11960,7930 12030,7930 ; 11960,7935 12030,7935 ; 11960,7940 12030,7940 ; 11960,7945 12030,7945 ; 11963,7554 12030,7554 ; 11964,7559 12030,7559 ; 11965,7564 12030,7564 ; 11966,7569 12030,7569 ; 11967,7574 12030,7574 ; 11968,7579 12030,7579 ; 11969,7584 12030,7584 ; 11970,7589 12030,7589 ; 11971,7594 12030,7594 ; 11972,7599 12030,7599 ; 11973,7604 12030,7604 ; 11975,7609 12030,7609 ; 11976,7614 12030,7614 ; 11977,7619 12030,7619 ; 11978,7623 12030,7623 ; 11979,7628 12030,7628 ; 11980,7633 12030,7633 ; 11981,7638 12030,7638 ; 11982,7643 12030,7643 ; 11983,7648 12030,7648 ; 11984,7653 12030,7653 ; 11985,7658 12030,7658 ; 11986,7663 12030,7663 ; 11987,7668 12030,7668 ; 11988,7673 12030,7673 ; 11989,7678 12030,7678 ; 11990,7683 12030,7683 ; 11991,7688 12030,7688 ; 11993,7692 12030,7692 ; 11994,7697 12030,7697 ; 11995,7702 12030,7702 ; 11996,7707 12030,7707 ; 11997,7712 12030,7712 ; 11998,7717 12030,7717 ; 11999,7722 12030,7722 ; 12000,7727 12030,7727 ; 12001,7732 12030,7732 ; 12002,7737 12030,7737 ; 12003,7742 12030,7742 ; 12004,7747 12030,7747 ; 12005,7752 12030,7752 ; 12006,7757 12030,7757 ; 12007,7761 12030,7761 ; 12008,7766 12030,7766 ; 12009,7771 12030,7771 ; 12010,7776 12030,7776 ; 12012,7781 12030,7781 ; 12013,7786 12030,7786 ; 12014,7791 12030,7791 ; 12015,7796 12030,7796 ; 12016,7801 12030,7801 ; 12017,7806 12030,7806 ; 12018,7811 12030,7811 ; 12019,7816 12030,7816 ; 12020,7821 12030,7821 ; 12021,7826 12030,7826 ; 12035,10061 12020,10065 12085,10065 v1(12100,10050) ; 12075,7063 v1(12075,7500) ; 12205,9685 12205,9645 12245,9605 v1(12245,9520) ; v1(12230,7560) 12240,7570 12240,8475 12230,8485 v1(12230,8505) ; v1(12230,9045) v1(12230,9280) ; 12335,8720 12345,8710 12345,8635 ; 12335,9320 12350,9305 12350,9235 12350,9239 ; 12345,7520 12345,7460 12350,7439 ; 12350,8039 12360,8040 12350,8040 12355,8035 12355,8065 12340,8080 12340,8160 12415,8235 v1(12415,8775) ; v1(12455,8890) 12510,8890 12510,8889 ; 12575,10086 12580,10085 v1(12635,10085) ; 6678,9378 6678,9562 6680,9561 6678,9567 6678,9378 ; 7290,8050 7285,8055 7290,8050 ; v1(7425,8780) 7425,8760 v1(7425,8780) ; 7660,8745 v1(7645,8760) 7660,8745 ; 7950,8765 v1@7950,8805 ; 7950,8765 v1@7950,8805 ; 7950,8765 v1@7950,8805 ; 8013,8211 7936,8211 8013,8211 ; 8013,8545 8015,8545 ; 8013,8545 8015,8545 ; v1@8045,9435 v1(8040,9435) v1@8045,9435 ; 8055,8605 8070,8620 ; 8055,8605 8013,8605 8055,8605 ; 8055,8605 8070,8620 ; 8065,8585 8090,8610 ; 8065,8585 8090,8610 ; 8090,8565 v1(8105,8580) 8090,8565 ; 8090,8565 8085,8565 8013,8565 8090,8565 ; 12035,7545 11956,7545 12035,7912 12035,7545 ; 12035,7545 11955,7545 11955,7955 12035,7955 12035,7545 ; v3@4532,9327 4582,9327 4582,9365 4532,9365 v3@4532,9327 ; 4532,9555 4581,9555 4581,9593 4532,9593 4532,9555 ; 5460,8985 5460,9135 5530,9135 5530,8985 5460,8985 ; 6575,8105 6915,8105 6915,8295 6575,8295 6575,8105 ; 7635,8285 7800,8285 7800,8450 7635,8450 7635,8285 ; v1(8550,8375) 8550,8465 v1(8550,8375) ; 9809,7195 10222,7195 10222,7675 9809,7675 9809,7195 ; 11655,7580 11945,7580 11945,7920 11655,7920 11655,7580
  Top Layer, Top w12: 4630,10130 4690,10130 ; 4635,6650 4695,6650 ; 4660,10100 4660,10160 ; 4665,6620 4665,6680 ; 7290,8710 7350,8710 ; 7320,8680 7320,8740 ; 8090,7910 8150,7910 ; 8120,7880 8120,7940 ; 12515,6910 12575,6910 ; 12545,6880 12545,6940 ; 12840,10375 12900,10375 ; 12870,10345 12870,10405
  Top Layer, Top w14: v1(4650,7740) 4650,7840 4675,7865 4705,7865 4700,7865 ; 4655,9460 5030,9460 5077,9507 5077,9532 5077,9581 ; 4661,9409 4663,9409 4715,9409 v1(4879,9409) ; 4661,9511 4700,9510 4720,9530 4720,9560 4720,9640 4745,9665 4745,9680 ; 4665,9485 5010,9485 5052,9527 5052,9542 5052,9581 ; 4795,9040 4870,9040 4899,9069 4899,9195 4899,9305 4899,9349 4910,9360 4910,9395 4895,9410 v1@4880,9410 ; 4810,8380 4810,8410 v1(4825,8425) ; 4822,9305 4822,9357 4835,9370 v1(4875,9370) ; 4822,9522 4822,9581 ; 4830,9695 4835,9695 4930,9695 4975,9650 4975,9620 4975,9581 ; 4924,9524 4924,9581 ; v1(4935,9640) 4950,9625 4950,9575 ; 4999,9680 5001,9664 5001,9581 5001,9526 ; 5005,8550 5045,8510 5095,8510 5115,8490 5115,8450 ; 5026,9581 5026,9616 5026,9621 5026,9631 5040,9645 5065,9645 5075,9655 5075,9690 5080,9695 5075,9680 ; v1(5075,9370) 5075,9390 5105,9420 5105,9545 5145,9585 ; 5141,8362 5141,8401 v1@5165,8425 ; 5145,9580 v1(5145,9610) ; v1(5165,8430) 5175,8420 5505,8420 5565,8360 5565,8165 5625,8105 5625,8040 ; v1(5280,7695) 5330,7745 5335,7745 ; 5345,7585 5380,7585 5405,7560 5585,7560 5600,7575 5600,7625 ; 5440,7825 5405,7825 5390,7810 5390,7705 5370,7685 5365,7685 5340,7660 5230,7660 5230,7685 ; 5450,7425 5450,7380 5465,7365 5500,7365 5500,7425 5500,7370 5545,7325 5750,7325 5795,7370 5795,7400 ; 5450,7600 5450,7735 5450,7745 5550,7745 5550,7746 ; 5470,7830 5470,7850 5490,7870 v1(5490,7985) ; 5500,7625 5500,7685 5515,7700 5550,7700 ; 5550,7425 5550,7385 5570,7365 5670,7365 5700,7395 5700,7410 5720,7405 5760,7445 5865,7445 5875,7455 5875,7520 5820,7575 ; 5595,7430 5595,7465 5595,7500 ; 5595,7645 5615,7665 5715,7665 ; 5610,7955 5610,7760 5630,7740 5655,7740 ; 5650,7745 5605,7700 5550,7700 ; 5660,7745 5675,7745 ; 5700,7500 5595,7500 ; 5700,7580 5715,7580 5795,7505 5795,7480 5800,7480 ; 5825,9299 5825,9365 5925,9465 5925,9631 ; 6040,7450 6040,7470 5970,7540 5970,7655 5970,7660 5995,7685 6095,7685 6115,7705 6115,7780 ; 6040,7606 6161,7606 6185,7606 6309,7606 6305,7604 ; 6095,7775 6100,7775 ; 6840,8425 6885,8380 7175,8380 7210,8380 7240,8350 ; v1(6911,9546) 6911,9600 ; 7015,7200 7010,7200 7005,7205 7005,7235 7050,7280 ; 7050,7285 7050,7370 7070,7390 7105,7390 ; 7070,8430 7275,8430 7285,8430 ; 7240,8360 7350,8360 ; 7295,7390 7335,7390 7350,7375 v1(7350,7255) ; 7452,9502 7455,9505 v1(7500,9505) ; 7560,9700 7561,9689 ; 7561,9595 7561,9694 ; 7637,9502 7637,9567 7640,9595 ; v1(7660,10100) 7660,10300 7669,10292 ; 7835,7930 7860,7930 7875,7915 v1(7875,7725) ; 7900,6600 7900,6630 8040,6770 8040,6810 8050,6818 ; 8000,10000 8000,10150 7920,10230 7920,10365 8000,10445 8000,10509 ; 8050,10000 8050,10170 8080,10200 8080,10370 8160,10450 8165,10509 ; 8100,10000 v1(8100,10100) ; 8150,10000 v1(8150,10135) ; v1(8180,10180) 8200,10160 8200,10000 ; 8250,10000 8250,10405 8320,10475 8330,10509 ; v1(8300,9920) 8300,9960 8300,10000 ; v1(8550,6690) 8550,6818 ; 9625,7110 9775,7110 9795,7090 9795,6750 9865,6680 10040,6680 10090,6730 10090,6770 10082,6783 ; 10035,6936 10035,6905 10065,6875 10155,6875 10200,6830 10200,6600 10225,6575 10260,6575 10270,6570 ; 10035,7020 10150,7020 10150,7055 10315,7220 10315,7280 ; v1(10190,9940) 10211,9961 10250,9961 ; 12254,6577 12254,6544 12307,6544 ; 12267,6649 12262,6647 12257,6642 12254,6637 12254,6627 12257,6622 12262,6617 12267,6614 12274,6612 12287,6612 12294,6614 12299,6617 12304,6622 12307,6627 12307,6637 12304,6642 12299,6647 12294,6649 ; 12272,6714 12307,6714 ; 12272,6788 12324,6788 ; 12279,6544 12279,6564 ; 12279,6788 12274,6793 12272,6798 12272,6806 12274,6811 12279,6816 12287,6818 12292,6818 12299,6816 12304,6811 12307,6806 12307,6798 12304,6793 12299,6788 ; 12282,6714 12274,6721 12272,6726 12272,6734 12274,6739 12282,6741 ; 12307,6741 12282,6741 ; 12307,6769 12282,6769 12274,6766 12272,6761 12272,6754 12274,6749 12282,6741 ; 12379,6589 12384,6591 12387,6599 12387,6604 12384,6611 12377,6616 12364,6618 12352,6618 ; 12379,6687 12384,6690 12387,6697 12387,6702 12384,6710 12377,6715 12364,6717 12352,6717 ; 12379,6786 12384,6789 12387,6796 12387,6801 12384,6808 12377,6813 12364,6816 12352,6816 ; 5230,7685 v1(5230,7700) ; 5230,7685 v1(5230,7700) ; v1(5230,7700) 5230,7746 v1(5230,7700) ; 5390,7500 5440,7500 5595,7500 ; 5390,7500 5320,7500 5390,7500 ; 5550,7700 5550,7630 5550,7700 ; 12345,6569 12377,6539 ; 12345,6569 12337,6564 12335,6557 12335,6552 12337,6544 12345,6539 12357,6537 12364,6537 12377,6539 ; 12345,6569 12357,6571 12364,6571 12377,6569 12384,6564 12387,6557 12387,6552 12384,6544 12377,6539 ; 12345,6668 12377,6638 ; 12345,6668 12337,6663 12335,6655 12335,6650 12337,6643 12345,6638 12357,6636 12364,6636 12377,6638 ; 12345,6668 12357,6670 12364,6670 12377,6668 12384,6663 12387,6655 12387,6650 12384,6643 12377,6638 ; 12345,6767 12377,6737 ; 12345,6767 12337,6762 12335,6754 12335,6749 12337,6742 12345,6737 12357,6734 12364,6734 12377,6737 ; 12345,6767 12357,6769 12364,6769 12377,6767 12384,6762 12387,6754 12387,6749 12384,6742 12377,6737 ; 12352,6618 12342,6616 12337,6611 12335,6604 12335,6601 12337,6594 12342,6589 12350,6586 12352,6586 12360,6589 12364,6594 12367,6601 12367,6604 12364,6611 12360,6616 12352,6618 ; 12352,6717 12342,6715 12337,6710 12335,6702 12335,6700 12337,6692 12342,6687 12350,6685 12352,6685 12360,6687 12364,6692 12367,6700 12367,6702 12364,6710 12360,6715 12352,6717 ; 12352,6816 12342,6813 12337,6808 12335,6801 12335,6799 12337,6791 12342,6786 12350,6784 12352,6784 12360,6786 12364,6791 12367,6799 12367,6801 12364,6808 12360,6813 12352,6816 ; 12272,6676 12272,6684 12274,6689 12279,6694 12287,6696 12292,6696 12299,6694 12304,6689 12307,6684 12307,6676 12304,6671 12299,6666 12292,6664 12287,6664 12279,6666 12274,6671 12272,6676 ; 12302,6592 12304,6594 12307,6592 12304,6589 12302,6592
  Top Layer, Top w16: 4685,8435 4685,8415 4695,8405 4715,8405 4725,8405 4750,8380 4750,8370 4750,8290 ; 4700,7440 4730,7450 4840,7450 ; 4700,7865 4640,7925 4640,8340 4665,8365 4670,8370 v1(4705,8370) ; 4700,7960 4700,7950 4725,7925 4795,7925 4809,7939 4809,7987 ; 4700,8039 4705,8035 4705,8090 ; 4710,7685 4710,7785 4725,7785 4765,7825 4765,7855 4770,7860 4834,7924 4834,7987 ; 4750,6993 4750,6935 4845,6840 4839,6800 5080,6800 5100,6783 ; 4760,6800 4760,6805 4640,6925 4640,7500 4660,7520 4700,7519 4700,7525 4700,7611 4741,7611 4770,7640 4770,7715 4796,7741 4825,7741 ; 4765,8440 4770,8435 ; 4770,8465 4775,8470 4860,8470 4886,8444 4886,8409 4886,8362 ; 4780,7320 4870,7320 4945,7390 ; 4783,8092 4783,8065 4783,8012 ; 4783,8242 4783,8285 4783,8362 ; 4820,8565 4920,8565 4920,8515 4988,8447 4988,8407 4988,8362 ; 4825,7820 4830,7820 ; 4825,7825 v1(4825,7865) 4860,7900 4860,7987 ; 4834,8246 4834,8285 4834,8362 ; 4855,7670 4886,7701 4886,7987 ; 4860,7650 4861,7650 4861,7574 4861,7550 ; 4911,7987 4911,7794 4911,7694 4935,7670 ; 4911,8362 4911,8421 v1@4925,8435 ; 4936,7629 4939,7650 4939,7566 4940,7550 4940,7460 4944,7450 4944,7389 ; 4937,8103 4937,8065 4937,7987 4937,7758 4950,7745 4965,7745 ; 4962,7987 4962,7863 4985,7840 ; 4962,8277 4962,8285 4962,8362 ; v1(4965,7700) 4965,7745 ; 4975,7745 4965,7745 ; 4988,7987 4988,7832 4990,7825 ; 5013,8212 5013,8240 5013,8285 5013,8362 ; 5014,7987 5014,8065 5014,8110 5014,8141 ; 5035,7360 5090,7310 5230,7310 ; 5036,7359 5036,7450 5036,7534 5036,7550 5036,7576 5036,7650 5040,7670 ; 5039,7987 5039,7694 5040,7655 ; 5065,7987 5065,7725 5065,7710 5115,7660 ; 5065,8362 5065,8415 ; 5090,7987 5090,7905 v1(5120,7875) 5120,7825 ; 5100,6566 5105,6580 5200,6675 5200,6988 5200,6965 5300,7065 5300,7380 5345,7425 ; 5110,7825 5125,7825 ; 5115,7450 5110,7450 5135,7425 5225,7425 ; 5115,7645 5115,7650 ; 5116,7987 5116,7929 5160,7885 5200,7885 5235,7850 5235,7820 ; 5116,8259 5116,8285 5116,8362 ; v1(5130,7700) 5130,7735 ; 5141,7987 5141,7944 5165,7920 5255,7920 5270,7920 5355,7920 ; 5167,8083 5167,8065 5167,8012 ; 5167,8243 5167,8285 5167,8362 ; 5220,7825 5335,7824 ; 5225,7505 5225,7504 5324,7504 5325,7504 ; 5230,7510 5230,7660 5230,7685 v1(5230,7700) 5230,7746 ; 5235,8050 5235,8000 5255,7999 5276,7999 5355,7999 ; 4783,8012 4783,7987 4783,8012 ; 5065,8415 5040,8440 5065,8415 ; 5116,8362 5116,8441 5116,8362 ; 5167,8012 5167,7987 5167,8012
  Top Layer, Top w18: 5115,7560 5115,7635 ; 5625,9519 5625,9625 5625,9631 ; 5675,9519 5675,9605 5675,9631 ; 5725,9519 5725,9610 5725,9631 ; 5775,9519 5775,9595 5775,9631 ; 5825,9519 5825,9610 5825,9631 ; 5875,9519 5875,9605 5875,9631 ; 6128,6802 6144,6802 ; 6138,7052 6144,7052 ; 6264,9272 6270,9270 6435,9270 6435,9260 6435,9175 6500,9110 6500,9050 ; 6365,9550 6370,9530 6370,9400 6370,9315 6410,9275 6440,9275 ; 6400,9050 6405,9045 6450,9000 6450,8995 6450,8875 6479,8846 6479,8755 ; 6600,8790 6600,8800 6650,8850 6650,8995 6600,9045 ; 6650,9275 6645,9290 6645,9175 6700,9120 6700,9050 ; 6750,9275 6850,9275 6855,9275 ; 6800,8711 6769,8711 6740,8740 6740,8865 6750,8875 6750,9000 6800,9050 ; 6900,8789 6900,8825 6850,8875 6850,8995 6900,9045 6900,9050 ; 7000,8789 7000,8845 7050,8895 7050,9005 7005,9050 7000,9050 ; 7100,8789 7100,8835 7150,8885 7150,8990 7110,9030 7100,9050 ; 7320,9390 7375,9390 7385,9400 7415,9400 ; 7560,9875 7561,9694 ; 7561,9595 7561,9689 ; 7595,9170 7595,9270 7596,9275 7596,9366 7600,9400 ; 7800,6818 7800,6745 7850,6695 7850,6550 7900,6500 ; 7800,6975 7860,6975 7875,6990 7920,6990 7925,6990 7925,7125 7925,7135 7810,7135 7800,7135 ; 7902,7362 7900,7345 7900,7295 7925,7270 7925,7214 ; 8050,6975 8105,6975 8120,6990 8175,6990 8175,7130 8175,7135 8065,7135 8050,7136 ; 8100,6500 8105,6500 8150,6545 8150,6735 8230,6815 8305,6815 8300,6818 ; 8152,7363 8150,7365 8150,7295 8175,7270 8175,7214 ; 8200,6500 8230,6500 8290,6560 8290,6680 8380,6770 v1(8380,6810) ; 8200,6600 8205,6580 v1(8205,6730) ; 8300,6975 8355,6975 8370,6990 8425,6990 8425,7000 8425,7135 8300,7135 ; 8402,7362 8405,7365 8405,7285 8425,7265 8425,7214 ; 8550,6975 8615,6975 8625,6985 8665,6985 8675,6989 8675,6995 8675,7135 8660,7135 8550,7135 ; 8652,7362 8650,7340 8650,7295 8675,7270 8675,7214 ; v1(8710,6810) 8723,6818 8800,6818 ; 8800,6975 8855,6975 8870,6990 8915,6990 8925,6989 8925,7125 8925,7135 8800,7135 ; 8849,8099 8850,8145 8850,8260 ; 8883,10005 8880,10015 8880,9915 8900,9895 8900,9784 ; 8900,9705 8895,9690 8895,9600 8922,9573 8922,9463 ; 8902,7363 8905,7360 8905,7280 8925,7260 8925,7214 ; 8949,8099 8950,8090 8950,8260 ; 8961,10005 8960,9995 8960,9915 9025,9850 9025,9789 ; v1(8970,6790) 8998,6818 9050,6818 ; v1(8985,6695) 8985,6670 9030,6625 9055,6625 ; 9025,9710 9025,9700 9025,9655 9142,9538 9142,9462 ; 9049,8099 9050,8120 9050,8261 ; 9050,6975 9105,6975 9120,6990 9160,6990 9175,6989 9175,7120 9175,7136 9170,7135 9050,7135 ; 9128,7518 9125,7515 9175,7515 9230,7460 9230,6860 9217,6847 9217,6783 ; 9149,8099 9150,8110 9150,8265 ; 9150,9789 9244,9789 9250,9789 9351,9789 9350,9789 9236,9789 9236,9834 9205,9865 9205,9955 ; 9155,7360 9155,7310 9175,7290 9175,7205 ; 9165,7620 9165,7725 9165,7810 9165,7850 ; 9205,10113 9205,10200 9220,10215 9219,10292 ; 9300,7310 9300,7220 9300,7214 9341,7214 9350,7205 9400,7205 ; 9345,9700 9345,9590 9355,9580 9355,9465 ; 9365,7925 9365,7850 9390,7825 9390,7715 ; 9375,9950 9380,9915 9380,9875 9450,9805 9450,9790 9550,9790 ; 9375,10108 9375,10310 9384,10292 ; 9382,6783 9380,6785 9490,6895 9630,6895 ; 9392,7778 9390,7765 9390,7715 ; 9405,7566 9380,7570 9295,7570 9410,7570 9410,7395 9565,7240 9565,7095 9565,7085 9585,7065 9654,7065 9674,7045 9674,6909 9660,6895 9625,6895 ; 9450,9794 9641,9794 9650,9790 ; 9502,7133 9502,7163 9502,7107 9500,7100 ; 9502,7168 9500,7160 9500,7100 ; 9550,9711 9552,9717 9552,9462 ; 9550,10292 9555,10260 9555,10100 9600,10055 9600,9990 ; v1(9560,6840) 9623,6842 ; 9570,7020 9550,7055 9500,7100 ; 9580,7030 9585,7019 ; 9585,6550 9585,6645 9586,6650 9585,6725 9585,6740 ; 9600,9911 9604,9911 9670,9845 9715,9845 9755,9805 9755,9785 9750,9789 9791,9789 9825,9755 9825,9550 9775,9500 9775,9455 9772,9462 ; 9625,7110 9695,7110 9725,7110 ; 9710,7335 9710,7280 9725,7265 9725,7189 ; v1(9795,10055) 9900,10055 9885,10057 ; v1(9805,7835) 9805,7945 9890,8030 9930,8030 9950,8050 9950,8110 9949,8099 ; 9880,10292 9885,10285 9885,10182 ; 9892,6908 9948,6908 9975,6935 10015,6935 10035,6936 ; 9930,7010 9930,7100 9934,7105 ; 10150,6940 10275,6940 10360,6855 ; 10156,9210 10156,9289 10145,9300 10145,9345 10143,9348 10143,9448 10175,9480 10175,9515 10175,9521 ; 10175,9600 10175,9760 10330,9915 10330,10165 10385,10220 10385,10292 ; 10250,10136 10250,10135 10250,10040 ; 10325,8305 10325,8175 10349,8151 10349,8099 ; 10533,6935 10440,6935 10360,6855 ; 10550,10292 10555,10275 10555,10163 ; 10555,10038 10560,10035 10560,9517 10560,10040 10680,10040 10705,10065 10705,10075 10705,10086 ; 10570,9139 10594,9139 10695,9139 10720,9140 10800,9140 ; 10617,6783 10617,6837 10660,6880 10660,6910 10658,6935 ; 10650,9800 10655,9780 10700,9780 10775,9705 10800,9705 ; 10800,9511 10803,9508 10803,9368 ; 10800,9706 10800,9705 ; 10905,9330 10905,9325 10902,9103 10902,9212 10906,9240 ; 10925,7070 10975,7070 11070,6975 11070,6905 11065,6900 ; 10955,6980 10955,6760 11020,6695 11060,6695 ; 11075,6800 11155,6800 11195,6840 11195,6995 11240,7040 11270,7040 11285,7037 ; 11285,6912 11292,6908 11292,6783 ; 11457,6783 11498,6783 11550,6835 11625,6835 11635,6838 ; 11635,6995 11635,7040 11650,7055 11650,7110 11645,7115 11520,7115 11525,7111 11499,7111 11400,7111 11634,7111 11650,7111 ; 11900,10140 11900,10220 11915,10235 11915,10375 12000,10460 12000,10509 ; 11930,6937 11930,6845 11967,6808 11967,6783 ; 12035,10140 12035,10170 12085,10220 12085,10370 12165,10450 12165,10475 12166,10509 ; 12075,6937 12080,6930 12080,6855 12132,6803 12132,6783 ; 12331,10509 12340,10500 12340,10435 12575,10200 12575,10165 ; 12339,7522 12350,7505 12350,7439 ; 12505,7601 12512,7603 12512,7500 ; 12510,7906 12512,7902 12512,7800 ; 12510,8201 12512,8177 12512,8100 ; 12510,8500 12512,8483 12512,8400 ; 12510,8810 12510,8730 12512,8700 ; 7415,9400 7415,9280 7415,9290 7411,9275 7411,9391 7415,9400 ; 9390,7715 9405,7700 ; 9390,7715 9405,7700 ; 9405,7700 9405,7645 9405,7700 ; 10155,10000 10195,10040 ; 10155,10000 10195,10040 ; 10155,10000 10105,10000 10155,10000 ; 10195,10040 10250,10040 ; 10195,10040 10250,10040 ; 10360,6855 10360,6853 10360,6855 ; 10800,9705 10800,9590 10800,9705